# Altium PCB PCB2.0.PcbDoc (part 2 of 2)
Units mm, origin at the board's own origin, x right, y up, seen from the top; angles counter-clockwise.
Board outline 68 x 50 mm, 4 copper layers (Top Layer, GND, VDD3V3, Bottom Layer), stack 0.778 mm thick; 115 components, 143 nets, 635 pads, 198 vias.
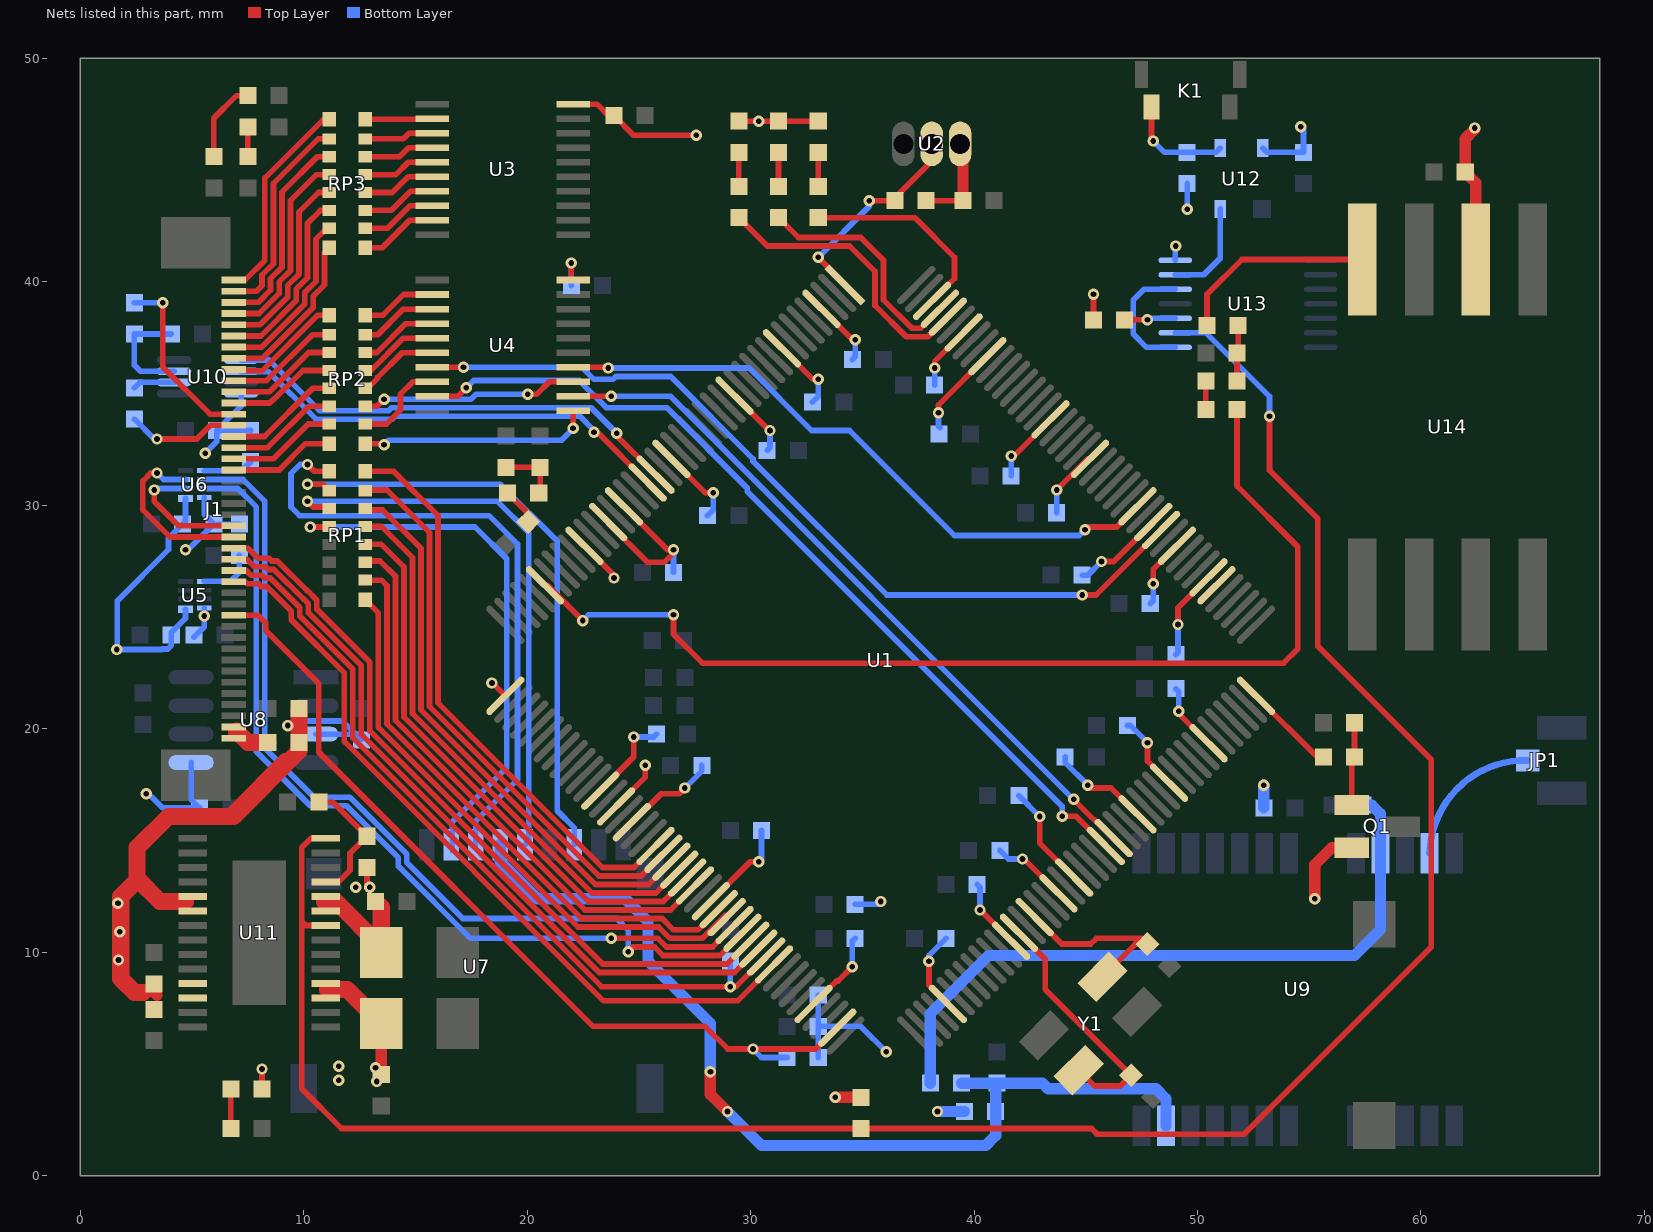
[diagram p4: the nets of this part, all layers, seen from the top]

## Via types
v1: diameter 0.508, hole 0.254, Top Layer to Bottom Layer, 197 vias
v2: diameter 0.762, hole 0.381, Top Layer to Bottom Layer, 1 vias

## Nets (pads, with @x,y where several pads share a name; then routed paths per layer and width w, separated by ;. In a path a pad name is that pad's centre, name@x,y a point inside that pad or via, vN(x,y) a via of type N, cw(c..) or ccw(c..) an arc to the next point about the centre after c; other vN are vias at no path point) (continued)
NetC25_1: C25.1 U1.104 Y1.1 | length 8.4
  Top Layer w0.254: U1.104@42.714,11.568 43.924,10.358 45.218,10.358 45.472,10.612 47.504,10.612 C25.1@47.758,10.358 47.218,10.358 Y1.1@45.748,8.888
NetC26_2: C26.2 U1.102 Y1.3 | length 11.3
  Top Layer w0.254: U1.102@42.007,10.86 43.186,9.682 43.186,8.326 C26.2@47.024,4.488 46.544,4.008 45.396,4.008 Y1.3@44.688,4.716
NetC27_2: C27.2 Q1.1 R6.2 | length 3.7
  Top Layer w0.254: Q1.1@56.902,16.581 56.902,18.613 R6.2@57.029,18.74 C27.2@57.029,20.264
NetFB5_2: FB5.2 R23.2 | length 1.3
  Top Layer w0.254: FB5.2@7.499,45.601 R23.2@7.499,46.934
NetFB6_2: FB6.2 R24.2 | length 3.7
  Top Layer w0.254: FB6.2@5.975,45.601 5.975,47.315 6.991,48.331 R24.2@7.499,48.331
NetFB7_1: FB7.1 R21.2 R22.1 | length 2.7
  Top Layer w0.254: R21.2@19.056,31.694 R22.1@20.58,31.694 20.58,30.614 FB7.1@20.516,30.551
NetFB7_2: FB7.2 R25.2 | length 1.7
  Top Layer w0.254: FB7.2@19.119,30.551 20.044,29.627 R25.2@20.044,29.253
NetFB8_1: FB8.1 R26.2 R27.1 | length 2.5
  Top Layer w0.254: FB8.1@51.771,35.55 R26.2@51.771,36.82 51.822,36.871 R27.1@51.822,38.044
NetFB8_2: FB8.2 R28.2 | length 1.3
  Top Layer w0.254: R28.2@50.374,34.28 FB8.2@50.374,35.55
NetK1_2: K1.2 R19.1 U12.3 | length 4.8
  Top Layer w0.254: K1.2@47.941,47.823 47.941,46.37 v1(48.012,46.299)
  Bottom Layer w0.254: v1(48.012,46.299) 48.52,45.791 R19.1@49.536,45.791 50.829,45.791 U12.3@51.019,45.981
NetLED1_2: LED1.2 R2.2 | length 1.5
  Top Layer w0.254: R2.2@29.47,44.267 LED1.2@29.47,45.791
NetLED2_2: LED2.2 R3.2 | length 1.5
  Top Layer w0.254: R3.2@31.248,44.267 LED2.2@31.248,45.791
NetLED3_2: LED3.2 R4.2 | length 1.5
  Top Layer w0.254: R4.2@33.026,44.267 LED3.2@33.026,45.791
NetLED4_1: LED4.1 R18.1 | length 1.8
  Top Layer w0.254: LED4.1@6.737,2.103 R18.1@6.737,3.881
NetR1_2: R1.2 U1.57 | length 4.1
  Top Layer w0.254: U1.57@23.269,17.224 23.269,17.238 24.771,18.74 v1(24.771,19.629)
  Bottom Layer w0.254: v1(24.771,19.629) 25.66,19.629 R1.2@25.787,19.756
NetR2_1: R2.1 U1.172 | length 12.8
  Top Layer w0.254: R2.1@29.47,42.87 30.74,41.6 34.423,41.6 35.566,40.457 35.566,38.933 36.963,37.536 37.924,37.536 U1.172@38.825,38.438
NetR3_1: R3.1 U1.173 | length 10.7
  Top Layer w0.254: R3.1@31.248,42.87 32.137,41.981 34.931,41.981 35.947,40.965 35.947,39.187 37.217,37.917 37.598,37.917 U1.173@38.472,38.791
NetR4_1: R4.1 U1.174 | length 9.2
  Top Layer w0.254: R4.1@33.026,42.87 37.344,42.87 39.122,41.092 39.122,40.149 U1.174@38.118,39.145
NetR6_1: R6.1 U1.132 | length 3.9
  Top Layer w0.254: U1.132@52.614,21.467 R6.1@55.341,18.74
NetR8_1: R8.1 U5.5 | length 2.5
  Bottom Layer w0.254: U5.5@5.545,26.594 6.717,26.594 7.118,26.995 R8.1@7.118,27.757
NetR9_1: R9.1 U6.5 | length 2.2
  Bottom Layer w0.254: U6.5@5.545,31.547 7.225,31.547 R9.1@7.626,31.948
NetR12_1: R12.1 R14.2 U10.3 | length 4.9
  Bottom Layer w0.254: R12.1@4.07,37.663 R14.2@2.419,37.663 2.419,36.266 2.689,35.996 U10.3@4.197,35.996
NetR13_2: R13.2 U10.2 | length 1.9
  Bottom Layer w0.254: R13.2@2.419,35.25 2.665,35.496 U10.2@4.197,35.496
NetR16_2: R16.2 R17.2 U11.25 | length 5.7
  Top Layer w0.254: R17.2@10.928,16.708 11.309,16.708 R16.2@12.833,15.184 12.071,14.422 12.071,13.66 11.552,13.141 U11.25@10.979,13.141
NetR20_1: R20.1 U13.10 | length 2.3
  Top Layer w0.254: R20.1@46.742,38.298 v1(47.758,38.298)
  Bottom Layer w0.254: v1@47.758,38.364 U13.10@49.004,38.364
NetR27_2: R27.2 U14.4 | length 9.2
  Top Layer w0.254: R27.2@50.425,38.044 50.425,39.441 51.984,41 U14.4@57.38,41 U14.4@57.207,41.173
NetRP1_9: RP1.9 U1.73 | length 25.9
  Top Layer w0.254: RP1.9@12.744,25.771 13.341,25.174 13.341,20.048 22.269,11.12 25.883,11.12 26.391,10.612 27.834,10.612 28.858,11.635 U1.73@28.926,11.568
NetRP1_10: RP1.10 U1.72 | length 26.3
  Top Layer w0.254: RP1.10@12.744,26.646 13.474,26.646 13.722,26.398 13.722,20.206 22.427,11.501 26.041,11.501 26.549,10.993 27.644,10.993 U1.72@28.572,11.921
NetRP1_11: RP1.11 U1.69 | length 25.5
  Top Layer w0.254: RP1.11@12.744,27.446 12.801,27.503 13.417,27.503 14.103,26.817 14.103,20.364 22.585,11.882 26.412,11.882 U1.69@27.512,12.982
NetRP1_12: RP1.12 U1.68 | length 25.4
  Top Layer w0.254: RP1.12@12.744,28.246 13.474,28.246 14.484,27.236 14.484,20.522 22.743,12.263 26.086,12.263 U1.68@27.158,13.335
NetRP1_13: RP1.13 U1.67 | length 25.4
  Top Layer w0.254: RP1.13@12.744,29.046 13.474,29.046 14.865,27.655 14.865,20.68 22.901,12.644 25.76,12.644 U1.67@26.804,13.689
NetRP1_14: RP1.14 U1.66 | length 25.3
  Top Layer w0.254: RP1.14@12.744,29.846 12.801,29.789 13.531,29.789 15.246,28.074 15.246,20.837 23.058,13.025 25.433,13.025 U1.66@26.451,14.042
NetRP1_15: RP1.15 U1.65 | length 25.5
  Top Layer w0.254: RP1.15@12.744,30.646 12.776,30.678 13.722,30.678 15.627,28.773 15.627,20.995 23.216,13.406 25.107,13.406 U1.65@26.097,14.396
NetRP1_16: RP1.16 U1.64 | length 25.7
  Top Layer w0.254: RP1.16@12.744,31.521 14.022,31.521 16.008,29.535 16.008,21.153 23.374,13.787 24.781,13.787 U1.64@25.744,14.749
NetRP2_10: RP2.10 U4.8 | length 4.2
  Top Layer w0.254: RP2.10@12.744,33.631 13.703,33.631 14.332,34.259 14.332,34.971 14.887,35.526 U4.8@15.754,35.526
NetRP2_12: RP2.12 U4.6 | length 3.7
  Top Layer w0.254: RP2.12@12.744,35.231 12.853,35.231 13.298,35.676 13.298,35.715 14.409,36.826 U4.6@15.754,36.826
NetRP2_13: RP2.13 U4.5 | length 3.6
  Top Layer w0.254: RP2.13@12.744,36.031 13.01,36.031 14.455,37.476 U4.5@15.754,37.476
NetRP2_14: RP2.14 U4.4 | length 3.5
  Top Layer w0.254: RP2.14@12.744,36.831 13.271,36.831 14.566,38.126 U4.4@15.754,38.126
NetRP2_15: RP2.15 U4.3 | length 3.5
  Top Layer w0.254: RP2.15@12.744,37.631 13.309,37.631 14.454,38.776 U4.3@15.754,38.776
NetRP2_16: RP2.16 U4.2 | length 3.4
  Top Layer w0.254: RP2.16@12.744,38.506 13.549,38.506 14.471,39.428 15.752,39.428 U4.2@15.754,39.426
NetRP3_9: RP3.9 U3.9 | length 3.5
  Top Layer w0.254: RP3.9@12.744,41.519 13.514,41.519 14.745,42.75 U3.9@15.754,42.75
NetRP3_10: RP3.10 U3.8 | length 3.4
  Top Layer w0.254: RP3.10@12.744,42.394 13.754,42.394 14.76,43.4 U3.8@15.754,43.4
NetRP3_11: RP3.11 U3.7 | length 3.4
  Top Layer w0.254: RP3.11@12.744,43.194 13.919,43.194 14.775,44.05 U3.7@15.754,44.05
NetRP3_12: RP3.12 U3.6 | length 3.3
  Top Layer w0.254: RP3.12@12.744,43.994 13.957,43.994 14.663,44.7 U3.6@15.754,44.7
NetRP3_13: RP3.13 U3.5 | length 3.2
  Top Layer w0.254: RP3.13@12.744,44.794 14.122,44.794 14.678,45.35 U3.5@15.754,45.35
NetRP3_14: RP3.14 U3.4 | length 3.2
  Top Layer w0.254: RP3.14@12.744,45.594 14.287,45.594 14.693,46 U3.4@15.754,46
NetRP3_15: RP3.15 U3.3 | length 3.1
  Top Layer w0.254: RP3.15@12.744,46.394 13.171,46.394 14.025,46.394 14.452,46.394 14.708,46.65 U3.3@15.754,46.65
NetRP3_16: RP3.16 U3.2 | length 3
  Top Layer w0.254: RP3.16@12.744,47.269 15.723,47.269 U3.2@15.754,47.3
NetU12_2: U12.2 U13.13 | length 4.5
  Bottom Layer w0.254: U13.13@49.004,40.314 50.282,40.314 51.019,41.051 U12.2@51.019,43.256
NetU13_8: U13.8 U13.12 | length 5.7
  Bottom Layer w0.254: U13.8@49.004,37.064 47.722,37.064 47.123,37.663 47.123,39.187 47.6,39.664 U13.12@49.004,39.664
POWER_RESET: R15.1 U11.22 U11.28 U13.9 | length 101.1
  Top Layer w0.254: U11.22@10.979,11.191 10.095,11.191 9.912,11.374 ; U11.28@10.979,15.091 10.327,15.091 9.912,14.676 9.912,11.374 ; v1(53.219,33.98) 53.219,31.567 55.378,29.408 55.378,23.693 60.458,18.613 60.458,10.231 52.076,1.849 45.516,1.849 45.262,2.103 R15.1@34.931,2.103 11.69,2.103 9.912,3.881 9.912,11.374
  Bottom Layer w0.254: U13.9@49.004,37.714 50.374,37.714 53.219,34.869 v1(53.219,33.98)
PWM1: J1.1 RP3.1 | length 8.9
  Top Layer w0.254: J1.1@7.372,40.076 8.261,40.965 8.261,44.648 10.882,47.269 RP3.1@11.144,47.269
PWM2: J1.2 RP3.2 | length 9
  Top Layer w0.254: J1.2@7.372,39.576 7.888,39.576 8.134,39.822 8.134,40.299 8.642,40.807 8.642,44.394 10.642,46.394 RP3.2@11.144,46.394
PWM3: J1.3 RP3.3 | length 8.7
  Top Layer w0.254: J1.3@7.372,39.076 7.965,39.076 8.515,39.626 8.515,40.141 9.023,40.649 9.023,44.013 10.604,45.594 RP3.3@11.144,45.594
PWM4: J1.4 RP3.4 | length 8.5
  Top Layer w0.254: J1.4@7.372,38.576 8.004,38.576 8.896,39.468 8.896,39.984 9.404,40.492 9.404,43.632 10.566,44.794 RP3.4@11.144,44.794
PWM5: J1.5 RP3.5 | length 8.2
  Top Layer w0.254: J1.5@7.372,38.076 8.043,38.076 9.277,39.31 9.277,39.826 9.785,40.334 9.785,43.124 10.655,43.994 RP3.5@11.144,43.994
PWM6: J1.6 RP3.6 | length 7.8
  Top Layer w0.254: J1.6@7.372,37.576 8.082,37.576 9.658,39.152 9.658,39.668 10.166,40.176 10.166,42.616 10.744,43.194 RP3.6@11.144,43.194
PWM7: J1.7 RP3.7 | length 7.4
  Top Layer w0.254: J1.7@7.372,37.076 8.12,37.076 10.039,38.995 10.039,39.51 10.547,40.018 10.547,41.906 11.035,42.394 RP3.7@11.144,42.394
PWM8: J1.8 RP3.8 | length 7
  Top Layer w0.254: J1.8@7.372,36.576 8.159,36.576 10.42,38.837 10.42,39.352 10.928,39.86 10.928,41.303 RP3.8@11.144,41.519
PWM9: J1.9 RP2.1 | length 4.8
  Top Layer w0.254: J1.9@7.372,36.076 7.436,36.012 8.134,36.012 10.628,38.506 RP2.1@11.144,38.506
PWM10: J1.10 RP2.2 | length 4.6
  Top Layer w0.254: J1.10@7.372,35.576 8.333,35.576 10.388,37.631 RP2.2@11.144,37.631
PWM11: J1.11 RP2.3 | length 4.5
  Top Layer w0.254: J1.11@7.372,35.076 8.468,35.076 10.223,36.831 RP2.3@11.144,36.831
PWM12: J1.12 RP2.4 | length 4.4
  Top Layer w0.254: J1.12@7.372,34.576 8.476,34.576 8.595,34.695 8.626,34.695 9.962,36.031 RP2.4@11.144,36.031
RF_IN: JP1.2 U9.11 | length 6.7
  Bottom Layer w0.305: U9.11@60.389,14.426 cw(c64.656,14.308) JP1.2@64.775,18.575
SBUS_RX: J1.13 R14.1 | length 8.2
  Top Layer w0.254: v1(3.689,39.06) 3.689,36.19 5.803,34.076 J1.13@6.864,34.076
  Bottom Layer w0.254: R14.1@2.419,39.06 v1(3.689,39.06)
SBUS_TX: J1.14 R13.1 | length 5.1
  Top Layer w0.254: v1(3.435,32.964) 5.213,32.964 5.825,33.576 J1.14@6.864,33.576
  Bottom Layer w0.254: R13.1@2.419,33.853 3.308,32.964 v1(3.435,32.964)
SCIRXA: J1.16 RP2.6 | length 4.5
  Top Layer w0.254: J1.16@7.372,32.576 8.381,32.576 10.236,34.431 RP2.6@11.144,34.431
SCIRXC: J1.18 RP2.8 | length 4.3
  Top Layer w0.254: J1.18@7.372,31.576 8.905,31.576 10.085,32.756 RP2.8@11.144,32.756
SCIRXDA: U1.145 U4.7 | length 38.2
  Top Layer w0.254: U4.7@15.752,36.178 U4.7@15.754,36.176 v1(17.151,36.176) ; v1(44.837,25.979) 45.459,25.979 U1.145@48.371,28.892
  Bottom Layer w0.254: v1(17.151,36.176) 22.448,36.176 22.993,35.631 23.838,35.631 23.965,35.758 26.422,35.758 30.105,32.075 30.105,31.97 36.096,25.979 v1(44.837,25.979)
SCIRXDA1: RP2.11 U4.13 | length 9.8
  Top Layer w0.254: RP2.11@12.744,34.431 13.284,34.431 v1(13.595,34.742) ; v1(20.021,34.971) 20.432,34.971 20.988,35.526 U4.13@22.054,35.526
  Bottom Layer w0.254: v1(13.595,34.742) 17.488,34.742 17.717,34.971 v1(20.021,34.971)
SCIRXDB: U1.26 U10.6 | length 20.4
  Top Layer w0.254: v1(22.993,33.269) 23.134,33.269 U1.26@25.39,31.013
  Bottom Layer w0.254: U10.6@7.197,35.996 7.218,35.975 8.425,35.975 10.547,33.853 13.963,33.853 14.09,33.98 22.358,33.98 22.993,33.345 v1(22.993,33.269)
SCIRXDC: U1.113 U4.9 | length 39.4
  Top Layer w0.254: U4.9@15.754,34.876 16.904,34.876 v1(17.278,35.25) ; v1(43.948,16.073) 44.573,16.073 U1.113@45.896,14.75
  Bottom Layer w0.254: v1(17.278,35.25) 17.608,35.58 22.325,35.58 23.545,34.361 26.251,34.361 29.851,30.761 29.851,30.616 43.948,16.519 v1(43.948,16.073)
SCIRXDC1: RP2.9 U4.11 | length 10.5
  Top Layer w0.254: RP2.9@12.79,32.71 RP2.9@12.744,32.756 13.549,32.756 v1(13.595,32.71) ; v1@22.054,33.422 U4.11@22.054,34.226
  Bottom Layer w0.254: v1(13.595,32.71) 13.798,32.913 21.545,32.913 22.053,33.421 v1(22.053,33.447)
SCITXA: J1.15 RP2.5 | length 4.7
  Top Layer w0.254: J1.15@7.372,33.076 8.246,33.076 10.401,35.231 RP2.5@11.144,35.231
SCITXC: J1.17 RP2.7 | length 4.4
  Top Layer w0.254: J1.17@7.372,32.076 8.643,32.076 10.198,33.631 RP2.7@11.144,33.631
SCITXDA: U1.148 U4.14 | length 28.9
  Top Layer w0.254: U4.14@22.054,36.176 23.591,36.176 v1(23.628,36.139) ; v1(44.964,28.9) 45.091,29.027 46.385,29.027 U1.148@47.31,29.952
  Bottom Layer w0.254: v1(23.628,36.139) 29.934,36.139 32.728,33.345 34.423,33.345 39.122,28.646 44.71,28.646 v1(44.964,28.9)
SCITXDB: U1.25 U10.5 | length 20.8
  Top Layer w0.254: v1(24.009,33.218) 24.009,33.101 U1.25@25.744,31.366
  Bottom Layer w0.254: U10.5@7.197,36.496 8.443,36.496 10.705,34.234 13.805,34.234 13.932,34.361 22.866,34.361 v1(24.009,33.218)
SCITXDC: U1.114 U4.12 | length 32.4
  Top Layer w0.254: U4.12@22.054,34.876 23.748,34.876 v1(23.755,34.869) ; v1(44.456,16.835) 46.188,15.103 U1.114@46.25,15.103
  Bottom Layer w0.254: v1(23.755,34.869) 26.422,34.869 v1(44.456,16.835)
SCL: J1.24 U6.3 | length 8
  Top Layer w0.254: v1(3.435,31.44) 3.156,31.44 2.8,31.084 2.8,29.789 4.013,28.576 J1.24@6.864,28.576
  Bottom Layer w0.254: v1(3.435,31.44) 3.728,31.147 U6.3@4.705,31.147
SCLA: U1.75 U6.6 | length 40.8
  Top Layer w0.254: v1(24.517,10.021) 24.727,10.231 25.695,10.231 26.076,9.85 28.622,9.85 U1.75@29.633,10.86
  Bottom Layer w0.254: U6.6@5.545,31.147 7.284,31.147 8.261,30.17 8.261,19.121 10.452,16.93 12.07,16.93 14.611,14.389 14.611,14.005 17.115,11.501 24.009,11.501 24.517,10.993 v1(24.517,10.021)
SDA: J1.23 U6.2 | length 5.9
  Top Layer w0.254: v1(3.308,30.678) 3.308,30.17 4.402,29.076 J1.23@6.864,29.076
  Bottom Layer w0.254: v1(3.308,30.678) 3.377,30.747 U6.2@4.705,30.747
SDAA: U1.74 U6.7 | length 39.3
  Top Layer w0.254: v1(23.755,10.612) 25.852,10.612 26.233,10.231 28.296,10.231 U1.74@29.279,11.214
  Bottom Layer w0.254: U6.7@5.545,30.747 7.049,30.747 7.88,29.916 7.88,18.963 10.294,16.549 11.912,16.549 14.23,14.231 14.23,13.848 17.466,10.612 v1(23.755,10.612)
SDCARD_CS: RP1.4 U7.2 | length 24.3
  Top Layer w0.254: v1(10.293,29.027) 11.125,29.027 RP1.4@11.144,29.046
  Bottom Layer w0.254: v1(10.293,29.027) 17.659,29.027 19.086,27.6 19.086,18.262 16.643,15.819 U7.2@16.643,14.549
SDCARD_MISO: RP1.2 U7.7 | length 27.2
  Top Layer w0.254: v1(10.166,30.932) 10.858,30.932 RP1.2@11.144,30.646
  Bottom Layer w0.254: v1(10.166,30.932) 18.802,30.932 21.342,28.392 21.342,16.327 22.1,15.569 U7.7@22.1,14.8
SDCARD_MOSI: RP1.1 U7.3 | length 28.7
  Top Layer w0.254: v1(10.166,31.821) 10.466,31.521 RP1.1@11.144,31.521
  Bottom Layer w0.254: v1@10.039,31.821 v1(10.166,31.821) 9.836,31.821 9.429,31.415 9.429,29.916 9.81,29.535 18.294,29.535 19.564,28.265 19.564,17.724 17.7,15.86 U7.3@17.7,14.8
SDCARD_SCLK: RP1.3 U7.5 | length 25.7
  Top Layer w0.254: v1(10.166,30.17) 10.42,29.916 11.144,29.916 RP1.3@11.144,29.846
  Bottom Layer w0.254: v1(10.166,30.17) 18.675,30.17 20.072,28.773 20.072,14.972 U7.5@19.9,14.8
SKY_SPEED_SENSE: R28.1 U1.39 | length 48
  Top Layer w0.254: U1.39@20.794,26.417 20.904,26.417 v1(22.485,24.836) ; v1(26.549,25.09) 26.549,24.226 27.844,22.931 53.854,22.931 54.489,23.566 54.489,28.138 51.771,30.856 R28.1@51.771,34.28
  Bottom Layer w0.254: v1(22.485,24.836) 22.739,25.09 v1(26.549,25.09)
T\R\S\T\: J1.27 R29.2 U1.78 | length 34.8
  Top Layer w0.254: J1.27@7.372,27.076 7.423,27.076 7.638,26.861 8.135,26.861 8.255,26.741 8.501,26.741 9.819,25.423 9.819,25.034 12.198,22.655 12.198,19.575 23.32,8.453 v1(29.089,8.453) 29.347,8.453 U1.78@30.693,9.8
  Bottom Layer w0.254: v1(29.089,8.453) R29.2@29.089,9.596
TCK: J1.31 R30.2 U1.87 | length 38.6
  Top Layer w0.254: J1.31@7.372,25.076 7.959,25.076 8.295,24.74 8.295,24.403 10.674,22.024 10.674,18.944 22.943,6.675 27.964,6.675 28.98,5.659 v1(30.105,5.659) 32.917,5.659 U1.87@33.875,6.618
  Bottom Layer w0.254: v1(30.105,5.659) 30.486,5.278 R30.2@31.629,5.278
TDI: J1.25 U1.76 | length 32.8
  Top Layer w0.254: J1.25@7.372,28.076 7.501,28.076 7.954,27.623 8.45,27.623 8.57,27.503 8.816,27.503 10.139,26.18 10.162,26.18 10.581,25.761 10.581,25.35 12.96,22.971 12.96,19.89 23.381,9.469 28.949,9.469 U1.76@29.986,10.507
TDO: J1.26 U1.77 | length 33.1
  Top Layer w0.254: J1.26@7.372,27.576 7.462,27.576 7.796,27.242 8.293,27.242 8.413,27.122 8.659,27.122 9.982,25.799 10.004,25.799 10.2,25.603 10.2,25.192 12.579,22.813 12.579,19.733 23.224,9.088 29.275,9.088 U1.77@30.34,10.153
TEMP_DQ: R7.2 U1.1 U2.2 | length 9.6
  Top Layer w0.254: v1(33.026,41.092) 34.229,39.889 U1.1@34.229,39.852 ; v1(35.312,43.632) R7.2@36.455,43.632 36.455,43.759 38.106,45.41 U2.2@38.106,46.172
  Bottom Layer w0.254: v1(33.026,41.092) 35.312,43.378 v1(35.312,43.632)
TMS: J1.28 U1.79 | length 34.2
  Top Layer w0.254: J1.28@7.372,26.576 7.468,26.48 7.977,26.48 8.097,26.36 8.343,26.36 9.438,25.265 9.438,24.876 11.817,22.497 11.817,19.417 23.416,7.818 29.419,7.818 U1.79@31.047,9.446
V5: FB2.1 J1.41 J1.42 | length 1.6
  Top Layer w0.762: 6.991,19.883 7.499,19.375 FB2.1@8.388,19.375
VCC3V3: C38.2 FB3.2 FB4.1 U7.4 U9.23 | length 44.3
  Top Layer w0.508: v1(28.2,4.643) 28.2,3.627 v1(28.962,2.865)
  Bottom Layer w0.508: U7.4@18.8,14.8 18.8,14.043 20.453,12.39 24.39,12.39 25.406,11.374 25.406,9.596 28.2,6.802 v1(28.2,4.643) ; v1(28.962,2.865) 30.486,1.341 40.519,1.341 40.963,1.786 FB3.2@40.963,2.865 C38.2@40.963,4.072 ; FB4.1@39.439,4.135 40.9,4.135 C38.2@40.963,4.072 ; U9.23@48.589,2.226 48.589,3.431 48.139,3.881 43.313,3.881 43.059,4.135 C38.2@41.027,4.135 C38.2@40.963,4.072
VCC_RF: C37.1 FB4.2 U9.9 | length 30.9
  Bottom Layer w0.508: FB4.2@38.042,4.135 38.042,7.247 40.646,9.85 57.029,9.85 58.189,11.01 U9.9@58.189,14.426 58.189,16.183 57.791,16.581 C37.1@57.41,16.581
VDD1V9: C1.1 C4.1 C5.1 C7.1 C9.1 C12.1 C14.1 C16.1 C17.1 C18.1 C20.1 C21.1 C22.1 C44.1 C45.2 R16.1 U1.4 U1.15 U1.23 U1.29 U1.31 U1.59 U1.61 U1.101 U1.109 U1.117 U1.126 U1.139 U1.146 U1.154 U1.167 U11.23 U11.24 | length 62.1
  Top Layer w0.254: R16.1@12.833,13.787 12.833,13.025 v1(12.96,12.898) ; U1.31@23.622,29.245 23.622,29.203 25.373,27.452 26.143,27.452 26.549,27.859 v1(26.549,28.011) 26.271,28.011 U1.29@24.33,29.952 ; U1.59@23.976,16.517 25.279,17.82 v1(25.279,18.359) ; U1.61@24.683,15.81 24.719,15.81 25.997,17.089 26.803,17.089 v1(27.057,17.343) ; U1.23@26.451,32.074 27.973,30.551 v1(28.327,30.551) ; U1.15@29.279,34.902 30.836,33.345 v1(30.867,33.345) ; U1.4@33.168,38.791 34.55,37.409 v1(34.677,37.409) ; v1(38.411,34.132) 38.411,34.488 U1.167@40.593,36.67 ; v1(40.265,11.882) 40.278,11.882 U1.101@41.654,10.507 ; v1(42.932,16.068) 42.932,14.885 U1.109@44.482,13.335 ; v1(43.694,30.678) 45.09,32.074 U1.154@45.189,32.074 ; v1(45.091,17.47) 45.218,17.343 46.131,17.343 U1.117@47.31,16.164 ; v1(45.701,27.478) 46.25,27.478 U1.146@48.018,29.245 ; v1(49.13,24.658) 49.13,25.407 U1.139@50.492,26.77 ; v1(49.155,20.772) 49.155,20.683 U1.126@50.492,19.346
  Top Layer w0.762: 10.928,12.263 11.436,12.263 C44.1@13.468,10.231 ; C45.2@13.214,12.263 13.468,12.009 C44.1@13.468,10.231 ; C44.1@13.468,9.977 C44.1@13.468,10.231
  Bottom Layer w0.254: C5.1@26.549,26.995 v1(26.549,28.011) ; v1(27.057,17.343) 27.819,18.105 C7.1@27.819,18.359 ; C4.1@28.073,29.535 28.327,29.789 v1(28.327,30.551) ; C1.1@30.74,32.456 30.867,32.583 v1(30.867,33.345) ; C16.1@34.55,36.52 34.677,36.647 v1(34.677,37.409) ; v1(38.411,34.132) 38.411,33.548 C21.1@38.487,33.472 ; C9.1@40.138,13.025 40.265,12.898 v1(40.265,11.882) ; C12.1@42,17 v1(42.932,16.068) ; C22.1@43.694,29.662 v1(43.694,30.678) ; C14.1@44.075,18.74 44.075,18.486 v1(45.091,17.47) ; C20.1@44.837,26.868 45.091,26.868 v1(45.701,27.478) ; C17.1@49.028,21.788 49.155,21.661 v1(49.155,20.772) ; C18.1@49.028,23.312 49.13,23.414 v1(49.13,24.658)
  other v1: 12.325,12.898
VDD3V3: C2.1 C3.1 C6.1 C8.1 C10.1 C11.1 C13.1 C15.1 C19.1 C28.2 C31.2 C32.2 C33.2 C34.2 C35.2 C39.1 C42.2 C43.1 C46.2 FB3.1 LED1.1 LED2.1 LED3.1 Q1.2 R5.2 R7.1 R8.2 R9.2 R11.1 R15.2 R18.2 R19.2 R20.2 R30.1 R31.1 R32.1 U1.9 U1.34 U1.45 U1.71 U1.84 U1.93 U1.107 U1.121 U1.143 U1.159 U1.170 U2.3 U3.20 U4.20 U5.8 U6.8 U8.5 U10.8 U11.17 U11.18 U12.4 U13.14 | length 91.8
  Top Layer w0.254: R18.2@8.134,3.881 v1(8.134,4.77) ; v1(18.421,22.042) 18.451,22.042 U1.45@19.026,21.467 ; v1(21.977,40.838) 21.977,40.153 U4.20@22.054,40.076 ; U3.20@22.054,47.95 23.12,47.95 C32.2@23.755,47.315 ; U1.34@22.562,28.185 23.882,26.864 v1(23.882,26.741) ; C32.2@23.882,47.442 24.771,46.553 v1(27.565,46.553) ; U1.71@28.219,12.275 29.985,14.041 v1(30.359,14.041) ; LED1.1@29.47,47.188 LED2.1@31.248,47.188 LED3.1@33.026,47.188 ; U1.9@31.401,37.023 32.793,35.631 v1(33.026,35.631) ; U1.84@32.815,7.678 33.843,8.707 33.915,8.707 v1(34.55,9.342) ; R7.1@37.852,43.632 39.376,43.632 39.503,43.505 C28.2@39.503,43.632 ; v1(37.979,9.596) 37.979,8.525 U1.93@38.825,7.678 ; v1(38.233,36.139) 38.233,36.431 U1.170@39.532,37.73 ; U2.3@39.376,46.172 U2.3@39.503,46.045 ; v1(41.662,32.202) 41.782,32.202 U1.159@43.421,33.841 ; v1(42.17,14.168) 42.235,14.168 U1.107@43.775,12.628 ; R20.2@45.345,38.298 v1(45.345,39.441) ; v1(47.758,19.375) 47.758,18.545 U1.121@48.725,17.578 ; v1(48.012,26.487) 48.012,27.118 U1.143@49.078,28.185
  Top Layer w0.508: C42.2@13.468,4.516 C43.1@13.468,6.802 ; v1(33.788,3.5) R15.2@34.931,3.5 ; C28.2@39.503,43.632 U2.3@39.503,46.045 ; v1(55.251,12.39) 55.251,13.914 56.013,14.676 Q1.2@56.902,14.676
  Top Layer w0.762: 11.055,8.326 11.944,8.326 C43.1@13.468,6.802
  Bottom Layer w0.254: v1(2.952,17.089) 3.054,17.089 3.689,16.454 C35.2@5.34,16.454 4.958,16.836 U8.5@4.958,18.486 ; v1(4.705,28.011) 4.832,28.011 C34.2@5.975,29.154 ; C33.2@5.086,24.096 5.545,24.555 v1(5.545,25.041) U5.8@5.545,25.394 ; U6.8@5.545,30.347 5.545,29.584 C34.2@5.975,29.154 ; v1(5.594,32.329) 6.102,32.837 C39.1@6.102,33.345 ; R8.2@7.118,29.154 C34.2@5.975,29.154 ; U10.8@7.197,34.996 7.197,34.44 C39.1@6.102,33.345 ; R9.2@7.626,33.345 C39.1@6.102,33.345 ; C31.2@21.977,39.822 v1(21.977,40.838) ; v1(30.359,14.041) 30.486,14.168 C3.1@30.486,15.438 ; C2.1@32.772,34.615 33.026,34.869 v1(33.026,35.631) ; R30.1@33.026,5.278 R32.1@33.026,6.675 ; R31.1@33.026,8.072 R32.1@33.026,6.675 ; v1(34.55,9.342) 34.55,10.485 C19.1@34.677,10.612 ; R5.2@34.677,12.136 35.693,12.136 v1(35.82,12.263) ; v1(36.074,5.532) 34.931,6.675 R32.1@33.026,6.675 ; v1(37.979,9.596) 37.979,9.85 C6.1@38.741,10.612 ; C15.1@38.233,35.377 v1(38.233,36.139) ; C8.1@41.154,14.549 41.535,14.168 v1(42.17,14.168) ; C13.1@41.662,31.313 v1(41.662,32.202) ; C10.1@46.869,20.137 46.996,20.137 v1(47.758,19.375) ; C11.1@47.885,25.598 48.012,25.725 v1(48.012,26.487) ; U13.14@49.004,40.964 49.004,41.576 v1(49.028,41.6) ; v1(49.536,43.251) R19.2@49.536,44.394 ; U12.4@52.919,45.981 53.109,45.791 C46.2@54.743,45.791 54.743,46.807 v1(54.616,46.934)
  Bottom Layer w0.508: v1(38.36,2.865) FB3.1@39.566,2.865 ; R11.1@52.965,16.454 v1(52.965,17.47)
  other v1: 13.265,4.211 11.563,4.262 13.214,4.821 11.563,4.897 30.359,47.188
VDD5: C29.2 C30.2 C36.2 C40.2 C41.2 C47.2 FB2.2 U5.1 U6.1 U8.3 U11.5 U11.6 U11.11 U11.12 U14.2 VDR1.2 | length 48.9
  Top Layer w0.254: v1(9.277,20.137) 9.785,20.137
  Top Layer w0.508: C40.2@3.308,8.199 3.435,8.072 ; 6.872,16.375 9.15,18.653 ; v1@62.414,46.832 61.982,46.401 C47.2@61.982,44.902 62.46,44.424 U14.2@62.46,41
  Top Layer w0.762: 2.571,13.254 1.809,12.492 1.809,8.809 2.419,8.199 2.8,8.199 ; 4.705,12.263 3.562,12.263 2.546,13.279 2.546,14.676 3.943,16.073 6.864,16.073 9.785,18.994 FB2.2@9.785,19.375 9.785,20.137 VDR1.2@9.785,20.899
  Bottom Layer w0.254: U5.1@4.705,25.344 4.705,24.941 4.07,24.306 C30.2@4.07,24.201 4.07,23.718 3.918,23.566 3.656,23.566 3.631,23.541 1.657,23.541 1.657,25.725 3.943,28.011 3.943,28.519 C29.2@4.578,29.154 4.705,29.281 U6.1@4.705,30.297 ; v1(9.277,20.137) 9.506,20.137 9.709,20.34 11.741,20.34 C36.2@12.325,19.756 ; U8.3@10.548,19.756 C36.2@12.325,19.756 ; C36.2@12.579,19.502 C36.2@12.325,19.756
  other v1: 1.708,9.647 1.759,10.917 1.682,12.187 1.632,23.541 62.414,46.883
XCLOUT: U1.138
pads on no net: J1.0 K1.0 U1.2 U1.27 U1.28 U1.54 U1.62 U1.63 U1.81 U1.82 U1.90 U1.91 U1.94 U1.95 U1.100 U1.110 U1.111 U1.112 U1.115 U1.116 U1.119 U1.122 U1.123 U1.124 U1.127 U1.128 U1.129 U1.130 U1.131 U1.133 U1.134 U1.135 U1.136 U1.137 U1.141 U1.142 U1.149 U1.150 U1.151 U1.152 U1.153 U1.156 U1.157 U1.158 U1.161 U1.162 U1.163 U1.164 U1.165 U1.168 U1.169 U1.175 U1.176 U7.1 U7.8 U7.9 U9.1 U9.3 U9.4 U9.5 U9.6 U9.14 U9.15 U9.16 U9.17 U9.22 U11.1 U11.2 U11.7 U11.8 U11.13 U11.14 U11.15 U11.16 U11.19 U11.20 U11.21 U11.26 U11.27 U13.3 U13.6 U14.1 U14.5 U14.6 U14.7 U14.8

## Polygon pours and split planes (outlines as drawn)
GND on GND (split plane): 62.949,45 62.953,44.98 62.964,44.964 62.98,44.953 63,44.949 66.949,44.949 66.949,5.051 63,5.051 62.98,5.047 62.964,5.036 62.953,5.02 62.949,5 62.949,1.051 5.051,1.051 5.051,5 5.047,5.02 5.036,5.036 5.02,5.047 5,5.051 1.051,5.051 1.051,44.949 5,44.949 5.02,44.953 5.036,44.964 5.047,44.98 5.051,45 5.051,48.949 62.949,48.949
GND on GND (split plane): 67.49,0.51 0.51,0.51 0.51,49.49 67.49,49.49
VDD1V9 on VDD3V3 (split plane): 35.667,34.945 35.671,34.926 35.682,34.909 35.699,34.898 35.718,34.894 39.427,34.894 39.427,31.491 39.431,31.471 39.442,31.455 39.458,31.444 39.478,31.44 46.513,31.44 46.513,25.42 46.517,25.401 46.528,25.384 46.545,25.373 46.564,25.369 49.949,25.369 49.949,20.051 46,20.051 45.98,20.047 45.964,20.036 45.953,20.02 45.949,20 45.949,15.051 41,15.051 40.98,15.047 40.964,15.036 40.953,15.02 40.949,15 40.949,11.051 37.051,11.051 37.051,16.048 37.047,16.067 37.036,16.084 37.02,16.095 37,16.099 15,16.099 14.98,16.095 14.964,16.084 14.953,16.067 14.949,16.048 14.949,11.051 10.051,11.051 10.051,14.928 10.051,20.949 25.736,20.949 25.756,20.953 25.772,20.964 25.783,20.98 25.787,21 25.787,34.869 33.737,34.869 33.757,34.873 33.773,34.884 33.784,34.9 33.788,34.92 33.788,38.73 35.667,38.73
VDD3V3 on VDD3V3 (split plane): 61.423,44 61.427,43.98 61.438,43.964 61.454,43.953 61.474,43.949 66.949,43.949 66.949,5.051 63,5.051 62.98,5.047 62.964,5.036 62.953,5.02 62.949,5 62.949,1.051 5.051,1.051 5.051,5 5.051,6 5.047,6.02 5.036,6.036 5.02,6.047 5,6.051 2.419,6.051 2.419,43.606 7.245,43.606 7.265,43.61 7.281,43.621 7.292,43.638 7.296,43.657 7.296,47.797 61.423,47.797
VDD5 on VDD3V3 (split plane): 62.949,45 62.953,44.98 62.964,44.964 62.98,44.953 63,44.949 66.949,44.949 66.949,44.051 61.525,44.051 61.525,47.848 61.521,47.868 61.51,47.884 61.494,47.895 61.474,47.899 7.245,47.899 7.225,47.895 7.209,47.884 7.198,47.868 7.194,47.848 7.194,43.708 2.368,43.708 2.349,43.704 2.332,43.693 2.321,43.677 2.317,43.657 2.317,6 2.321,5.98 2.332,5.964 2.349,5.953 2.368,5.949 4.949,5.949 4.949,5.051 1.051,5.051 1.051,44.949 5,44.949 5.02,44.953 5.036,44.964 5.047,44.98 5.051,45 5.051,48.949 62.949,48.949
VDD3V3 on VDD3V3 (split plane): 67.49,0.51 0.51,0.51 0.51,49.49 67.49,49.49

## Keep-outs
Keep-Out Layer:
  the board outline again, w0.1

## Other copper
Top Layer:
  rectangle net GND: 2.038,18.105 3.181,20.391
  rectangle net VDD1V9: 12.071,12.39 12.706,13.279
  rectangle net VDD1V9: 12.706,11.882 13.976,13.279
  rectangle net VDD3V3: 11.182,3.754 13.849,5.278
  rectangle net GND: 15.881,2.992 17.913,10.993
  rectangle net VDD3V3: 10.293,7.818 11.563,8.707
  rectangle net VDD1V9: 10.293,11.755 11.69,12.644
  rectangle net GND: 2.038,20.391 8.769,21.28
  rectangle net V5: 6.229,19.375 8.769,20.264
  region net GND: 50.552,8.453 48.85,10.155 45.828,7.132 47.53,5.431
  rectangle net VDD5: 3.943,11.628 5.467,12.771
  rectangle net GND: 3.943,13.025 8.134,14.041
  rectangle net GND: 3.943,8.961 6.864,10.104
  rectangle net VDD5: 2.8,6.929 3.689,8.961
  rectangle net VDD5: 3.435,7.818 5.721,8.707
GND (plane layer: these items are gaps in the copper):
  lines w0.1: 1,5 1,45 5,45 5,49 63,49 63,45 67,45 67,5 63,5 63,1 5,1 5,5 1,5
VDD3V3 (plane layer: these items are gaps in the copper):
  lines w0.1: 67,44 61.474,44 61.474,47.848 7.245,47.848 7.245,43.657 2.368,43.657 2.368,6 5,6 5,5 ; 5,5 1,5 1,45 5,45 5,49 63,49 63,45 67,45 67,5 63,5 63,1 5,1 5,5 ; 10,11 10,14.928 10,21 25.736,21 25.736,34.92 33.737,34.92 33.737,38.781 35.718,38.781 35.718,34.945 39.452,34.945 39.478,34.92 39.478,31.491 46.564,31.491 46.564,25.42 50,25.42 50,20 46,20 46,15 41,15 41,11 37,11 37,16.048 15,16.048 15,11 10,11

## Silkscreen, mask and mechanical layers (free items; w line width, h text height)
Mechanical 1:
  circle w0.254: c3,47 r1.5
  circle w0.254: c3,3 r1.5
  circle w0.254: c65,47 r1.5
  circle w0.254: c65,3 r1.5

## Dimensions
68,50 to 68,0 on Mechanical 13
0,50 to 68,50 on Mechanical 13

## Text inside footprints (layer, text, board x,y; h text height)
U2: Top Overlay "A" at 38.454,48.223 h0.51 r180; Top Overlay "K" at 39.631,48.207 h0.51 r180; Top Overlay "R" at 37.197,48.223 h0.51 r180
U11: Top Overlay "*" at 4.781,16.539 h0.51; Mechanical 13 "*" at 4.781,16.539 h0.51